# Altium PCB PCB1.PcbDoc
Units mil, origin at the board's own origin, x right, y up, seen from the top; angles counter-clockwise.
Board outline 1275 x 1025 mil, 2 copper layers (Top Layer, Bottom Layer); 9 components, 5 nets, 16 pads, 3 vias.
Unrouted connection lines stored in the file: 1.
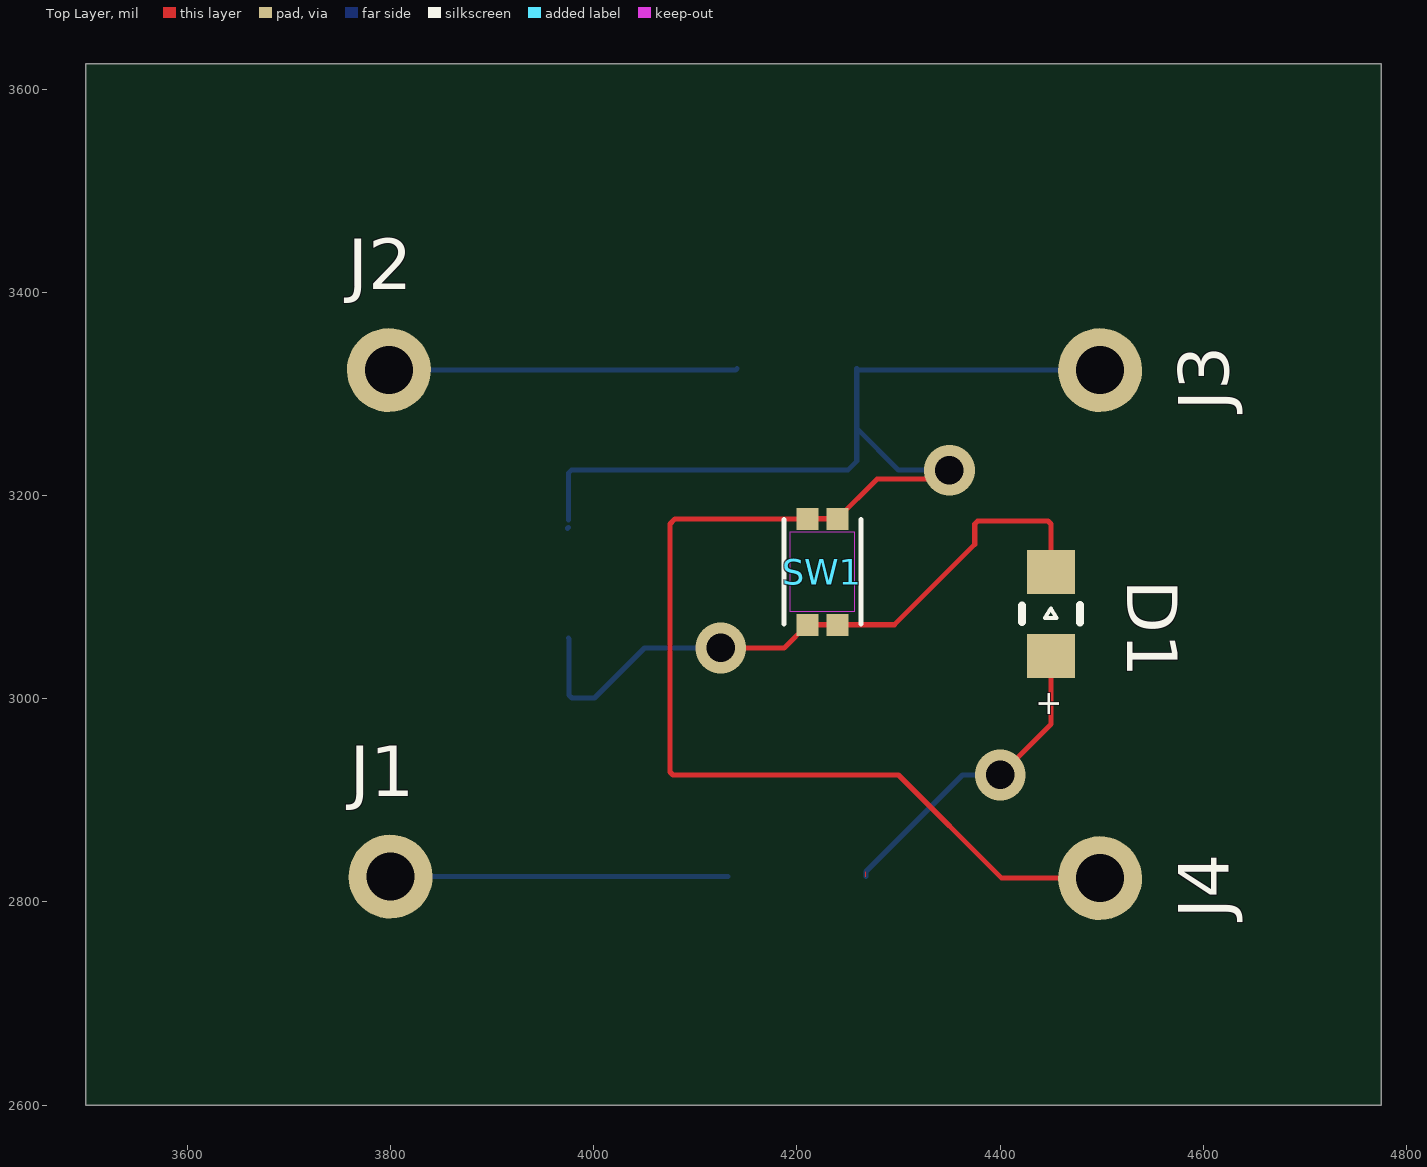
[diagram p0: Top Layer view]
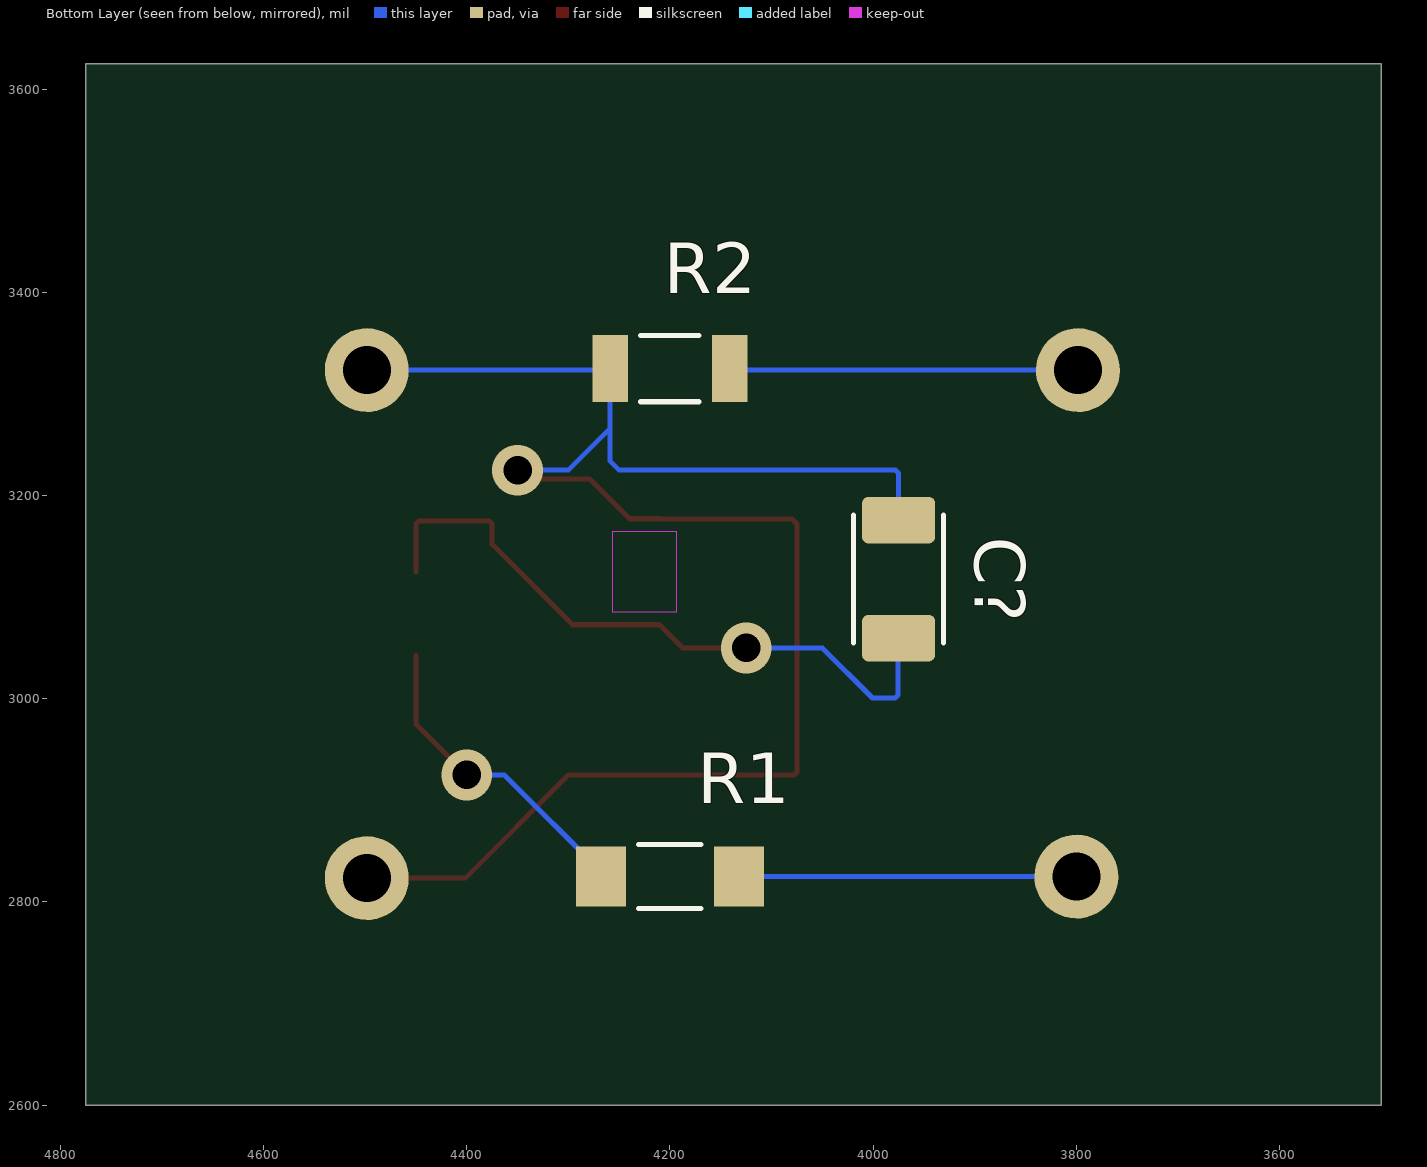
[diagram p1: Bottom Layer view, seen from below]

## Layer stack, top to bottom
Top Solder: solder mask 0.4, Solder Resist, Dk 3.5
Top Layer: signal copper 1.4
Dielectric 1: dielectric 12.6, FR-4, Dk 4.8
Bottom Layer: signal copper 1.4
Bottom Solder: solder mask 0.4, Solder Resist, Dk 3.5

## Board outline
3500,2600 3500,3625 4775,3625 4775,2600

## Design rules (kind name [scope] priority, off if disabled: settings)
Clearance [All] p1: gap=10 ignorepadtopadclearanceinfootprint=FALSE
PolygonConnect [All] p1: connectstyle=Relief reliefconductorwidth=10 reliefentries=4 polygonreliefangle="90 Angle" airgapwidth=10
RoutingVias [All] p1: holewidth=28 width=50 viastyle="Through Hole" minholewidth=28 minwidth=50 maxholewidth=28 maxwidth=50
SolderMaskExpansion [All] p1: expansion=0 istentingtop=FALSE
SupplyNets "Schematic Supply Nets_1" [InNet('GND')] p1: voltage=0.000
SupplyNets "Schematic Supply Nets" [InNet('VCC')] p2: voltage=0.000
Width [All] p1: maxlimit=10 minlimit=2 preferedwidth=5
30 further rules are at their usual default settings.

## Components (designator, comment, footprint, x,y, rotation, side; value= is the part's Value field where it differs from the comment)
C? "C1206C104K2RACTU" CAPC3216X110N 3975,3117.68 r90 bottom
D1 "LED" WL-SMCW_0805 4450,3083.66 r270 top
J1 "Connector" PCBComponent_1 3801.57,2826.57 r0 top
J2 "Connector" PCBComponent_1 3800,3325 r0 top
J3 "Connector" PCBComponent_1 4500,3325 r0 top
J4 "Connector" PCBComponent_1 4500,2825 r0 top
R1 "1kOm" RES_ERJU08F2202V 4200,2825 r180 bottom
R2 "10kOm" RESC3015X65N 4200,3325 r0 bottom
SW1 "Switch" SW_EVPBB2A9B000 4225,3125 r90 top

## Footprints (in the part's own frame and the unit in brackets; to place one, negate y for a bottom-side part, rotate by r counter-clockwise, add the part's x,y. Pads: shape width x height; smd on the part's side, far side on the other; paste and mask are expansions set on the pad)
CAPC3216X110N [mm]
  rrect25% 1.16x1.82 smd: 1(-1.475,0) 2(1.475,0)
  silkscreen extent -1.6,-1.12 1.6,1.12, body extent -1.6,-0.8 1.6,0.8, height 1.8
PCBComponent_1 [mm]
  round 2.1 hole 1.2: 1(-0.04,-0.04)
  body extent -1.31,-1.29 1.23,1.21, height 7.54
RES_ERJU08F2202V [mm]
  rect 1.25x1.5 smd: 1(-1.725,0) 2(1.725,0)
  silkscreen extent -0.78,-0.8 0.78,0.8
RESC3015X65N [mm]
  rect 0.89x1.68 smd paste+0 mask+0.102: 1(-1.495,0) 2(1.495,0)
  silkscreen extent -0.73,-0.83 0.73,0.83, body extent -1.53,-0.77 1.53,0.77, height 0.65
SW_EVPBB2A9B000 [mm]
  rect 0.55x0.55 smd paste-0.05: A1(-1.325,0.375) A2(-1.325,-0.375) B1(1.325,0.375) B2(1.325,-0.375)
  Keep-Out Layer region: 1,-0.802 -1.002,-0.802 -1.002,0.8 1,0.8
  silkscreen extent -1.3,-0.96 1.3,0.96, body extent -1.5,-0.9 1.5,0.9, height 0.63
WL-SMCW_0805 [mm]
  rect 1.1x1.2 smd: 1(-1.05,0) 2(1.05,0)
  silkscreen extent -0.21,-0.72 0.22,0.72, body extent -1,-0.7 1,0, height 0.63

## Part data
C?: "1206 C 100nF Ceramic Multilayer Capacitor, 200 V, +125degC, X7R Dielec, +/-10%", Package="1206-2 KEMET", Check_prices=https://www.snapeda.com/parts/C1206C104K2RACTU/KEMET/view-part/?ref=eda, MF=KEMET, MP=C1206C104K2RACTU, SnapEDA_Link=https://www.snapeda.com/parts/C1206C104K2RACTU/KEMET/view-part/?ref=snap
D1: library part WL-SMCW_0805, "Red 630nm LED Indication - Discrete 1.9V 0805 (2012 Metric)", Package="0805 WÃ¼rth Elektronik", Check_prices=https://www.snapeda.com/parts/150080SS75000/W%25C3%25BCrth+Elektronik+Midcom/view-part/?ref=eda, MF="WÃ¼rth Elektronik", MP=150080SS75000, SnapEDA_Link=https://www.snapeda.com/parts/150080SS75000/W%25C3%25BCrth+Elektronik+Midcom/view-part/?ref=snap
R1: library part ERJU08F2202V, Package=None, Availability=Unavailable, MP=ERJU08F2202V, Price=None
R2: library part CRCW120610K0JNEAC, "10 kOhms Â±5% 0.25W, 1/4W Chip Resistor 1206 (3216 Metric) - Thick Film", Package="3015 Vishay", Check_prices=https://www.snapeda.com/parts/CRCW120610K0JNEAC/Vishay+Dale/view-part/?ref=eda, MF="Vishay Dale", MP=CRCW120610K0JNEAC, SnapEDA_Link=https://www.snapeda.com/parts/CRCW120610K0JNEAC/Vishay+Dale/view-part/?ref=snap
SW1: library part EVPBB2A9B000, "Tactile Switch SPST-NO Top Actuated Surface Mount", Package=None, Check_prices=https://www.snapeda.com/parts/EVPBB2A9B000/Panasonic/view-part/?ref=eda, MF=Panasonic, MP=EVPBB2A9B000, SnapEDA_Link=https://www.snapeda.com/parts/EVPBB2A9B000/Panasonic/view-part/?ref=snap

## Via types
v1: diameter 50, hole 28, Top Layer to Bottom Layer, 3 vias

## Nets (pads, with @x,y where several pads share a name; then routed paths per layer and width w, separated by ;. In a path a pad name is that pad's centre, name@x,y a point inside that pad or via, vN(x,y) a via of type N, cw(c..) or ccw(c..) an arc to the next point about the centre after c; other vN are vias at no path point)
GND: J2.1 R2.1 | length 343.4
  Bottom Layer w5: J2.1 4139.57,3323.43 R2.1
NetC?_1: C?.1 D1.1 SW1.A1 SW1.A2 | length 664.2
  Top Layer w5: v1(4125,3050) 4187.4,3050 SW1.A1 SW1.A2 4295.87,3072.83 4375,3151.97 4375,3172.07 4377.93,3175 4447.07,3175 4450,3172.07 D1.1
  Bottom Layer w5: C?.1 3975.64,3058.97 3975.64,3003.57 3978.57,3000.64 4000.64,3000.64 4050,3050 v1(4125,3050)
NetC?_2: C?.2 J3.1 J4.1 R2.2 SW1.B1 SW1.B2 | length 1783.3
  Top Layer w5: v1(4350,3225) 4341.39,3216.39 4278.99,3216.39 SW1.B2 SW1.B1 4209.94,3176.87 4079.8,3176.87 4075,3172.07 4075,2927.93 4077.93,2925 4300,2925 4401.57,2823.43 J4.1
  Bottom Layer w5: C?.2@3974.36,3167.8 C?.2@3975,3168.44 ; C?.2 3975,3222.07 3977.93,3225 4250,3225 4258.86,3233.86 4258.86,3266.14 ; v1(4350,3225) 4300,3225 4258.86,3266.14 ; J3.1 4260.43,3323.43 R2.2 4258.86,3266.14
NetD1_2: D1.2 R1.1 | length 319.3
  Top Layer w0.5: 4267.91,2825 4267.91,2829.92
  Top Layer w5: v1(4400,2925) 4450,2975 D1.2
  Bottom Layer w5: R1.1 4267.91,2829.92 4362.99,2925 v1(4400,2925)
VCC: J1.1 R1.2 | length 332.1
  Bottom Layer w5: J1.1 R1.2

## Silkscreen, mask and mechanical layers (free items; w line width, h text height)
Mechanical 1:
  the board outline again, w47.24

## Text inside footprints (layer, text, board x,y; h text height)
D1: Top Overlay "+" at 4438.19,3008.86 h24 r270; Mechanical 13 "+" at 4438.19,3008.86 h24 r270